# EAGLE board wifilight-leds-cheaper (EAGLE 7.2.0)
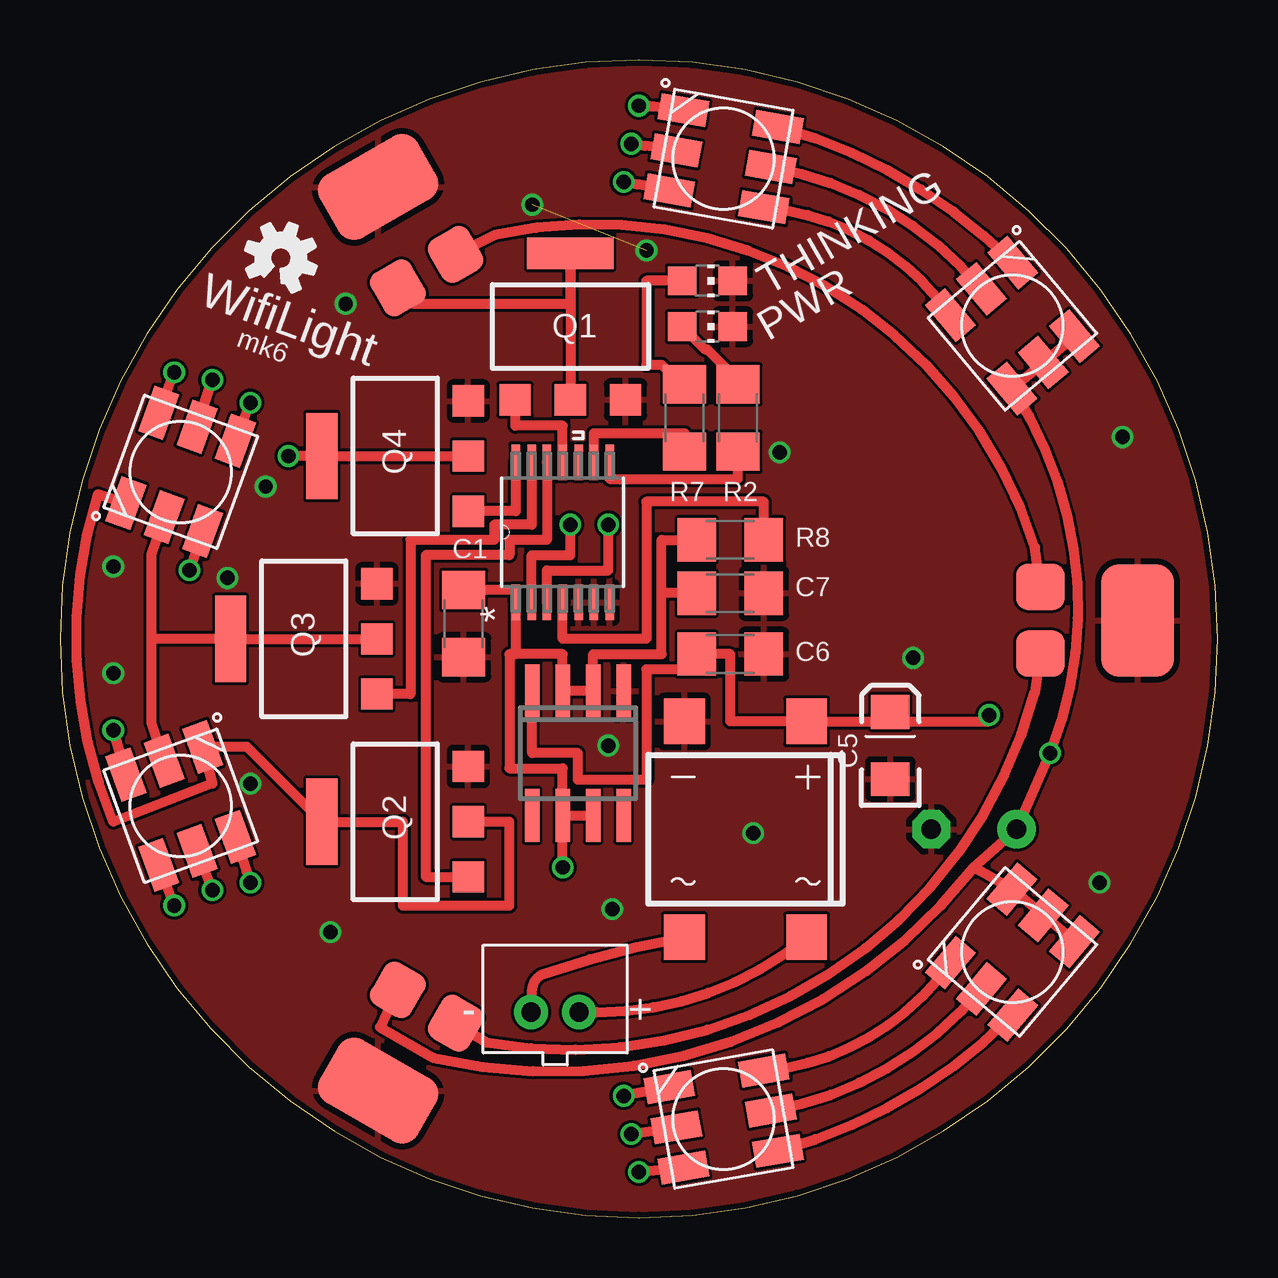
[diagram p0: board, top side]
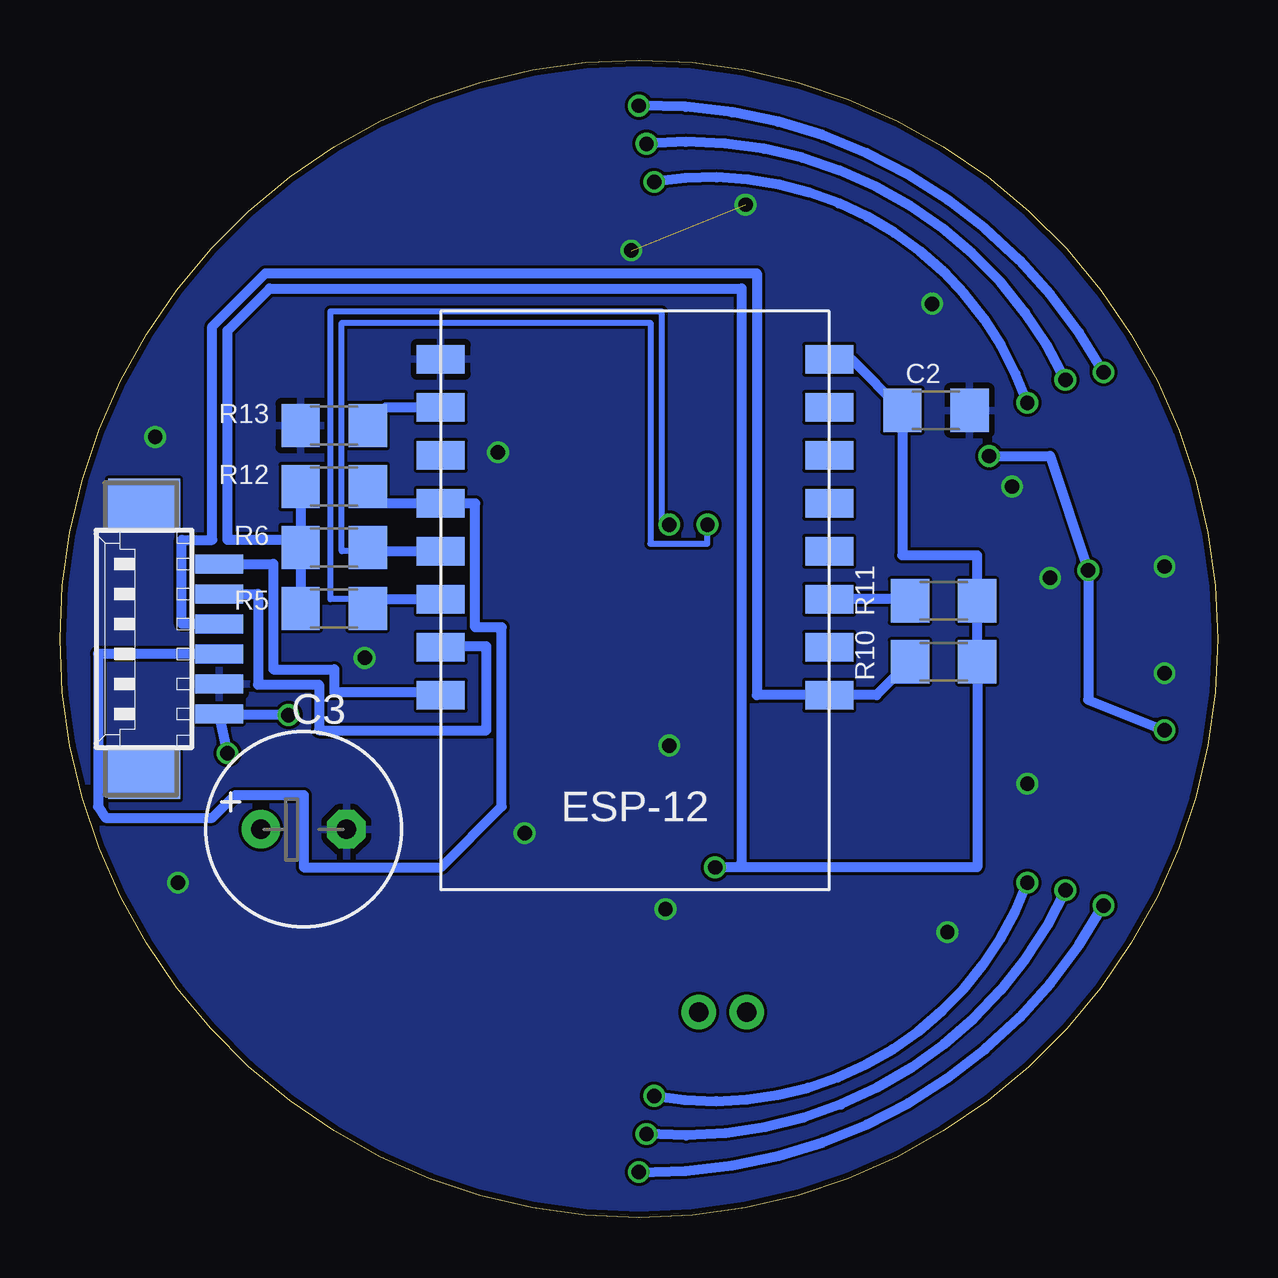
[diagram p1: board, bottom side, seen from below]

Size 48.26 x 48.26 mm. Coordinates in mm from the lower left corner, seen from the top.
Outline: 24.13,0 arc90 48.26,24.13 arc90 24.13,48.26 arc90 0,24.13 arc90 24.13,0
Copper layers (1*16): Top 0.035mm / dielectric 1.5mm / Bottom 0.035mm
Design rules "dirtypcbs": minimum track width 5mil, minimum drill 12mil, track to track 5mil, track to pad 5mil, pad to pad 5mil, via to via 5mil, smd to smd 0mil, copper to edge 10mil, drill to drill 10mil, minimum pad ring 10mil, minimum via ring 6mil, stop-mask expansion 2mil, vias tented up to drill 25mil, thermal gap 10mil

## Footprints (pad centres in the part's own frame; a part is rotated, then mirrored left to right if it is on the bottom)
DBS = smd 1.7 x 1.9: + -2.55,-4.5; - 2.55,-4.5; AC1 -2.55,4.5; AC2 2.55,4.5
1206 = smd 1.6 x 1.8: 1 -1.4,0; 2 1.4,0
E3,5-8 = drill 0.813 pad 1.6: + -1.778,0 | drill 0.813 pad 1.6 octagon: - 1.778,0
EIA3216 = smd 1.4 x 1.6: A 1.4,0; C -1.4,0
JST-PH-2-THM = drill 0.8 pad 1.422: 1 1,0; 2 -1,0
RGBLED5050 = smd 2 x 1.1: 1 -2,1.7; 2 -2,0; 3 -2,-1.7; 4 2,-1.7; 5 2,0; 6 2,1.7
ESP8266-ESP12 = smd 2 x 1.2: 1 16.2,2; 2 16.2,4; 3 16.2,6; 4 16.2,8; 5 16.2,10; 6 16.2,12; 7 16.2,14; 8 16.2,16; 9 0,16; 10 0,14; 11 0,12; 12 0,10; 13 0,8; 14 0,6; 15 0,4; 16 0,2
CHIP-LED0805 = smd 1.2 x 1.2: A 0,-1.05; C 0,1.05
SOT223 = smd 1.3 x 1.3: 1 -2.3,-3.05; 2 0,-3.05; 3 2.3,-3.05 | smd 3.6 x 1.3: 4 0,3.05
SO08 = smd 0.6 x 2.2: 1 -1.905,-2.6; 2 -0.635,-2.6; 3 0.635,-2.6; 4 1.905,-2.6; 5 1.905,2.6; 6 0.635,2.6; 7 -0.635,2.6; 8 -1.905,2.6
SOP65P640X120-14N = smd 1.473 x 0.356: 1 -2.921,1.956; 2 -2.921,1.295; 3 -2.921,0.66; 4 -2.921,0; 5 -2.921,-0.66; 6 -2.921,-1.295; 7 -2.921,-1.956; 8 2.921,-1.956; 9 2.921,-1.295; 10 2.921,-0.66; 11 2.921,0; 12 2.921,0.66; 13 2.921,1.295; 14 2.921,1.956
LUXEON-REBEL = smd 1.91 x 2.03: ANODE -1.39,2.63; CATHODE 1.39,2.63 | smd 4.68 x 3.03: P$3 0,-1.42
53261-06 = smd 0.8 x 2: 1 3.125,-2.5; 2 1.875,-2.5; 3 0.625,-2.5; 4 -0.625,-2.5; 5 -1.875,-2.5; 6 -3.125,-2.5 | smd 2.1 x 3: S1 5.625,0.625; S2 -5.625,0.625

## Placement (x,y rotation side)
B2  DBLS203G  [DBS]  28.57,16.19 180 top
C1  0.1uF  [1206]  16.83,24.77 270 top
C2  0.1uF  [1206]  11.75,33.65 0 bottom
C3  [E3,5-8]  38.1,16.19 0 bottom
C5  10uF  [EIA3216]  34.61,19.68 90 top
C6  0.1uF  [1206]  27.94,23.5 0 top
C7  10uF  [1206]  27.94,26.04 0 top
CN1  [JST-PH-2-THM]  20.64,8.57 0 top
LED1  RGBLED5050  [RGBLED5050]  39.7,11.07 230 top
LED2  RGBLED5050  [RGBLED5050]  27.66,4.11 190 top
LED3  RGBLED5050  [RGBLED5050]  5.03,17.17 110 top
LED4  RGBLED5050  [RGBLED5050]  39.7,37.19 130 top
LED5  RGBLED5050  [RGBLED5050]  27.66,44.15 170 top
LED6  RGBLED5050  [RGBLED5050]  5.03,31.09 250 top
MPU  ESP8266_ESP-12  [ESP8266-ESP12]  16.19,37.78 180 bottom
PWR  [CHIP-LED0805]  26.99,37.15 270 top
Q1  BUK98180-100A  [SOT223]  21.27,37.15 0 top
Q2  BUK98180-100A  [SOT223]  13.97,16.51 90 top
Q3  BUK98180-100A  [SOT223]  10.16,24.13 90 top
Q4  BUK98180-100A  [SOT223]  13.97,31.75 90 top
R2  220ohm  [1206]  28.26,33.34 90 top
R5  1k  [1206]  36.83,25.4 180 bottom
R6  1k  [1206]  36.83,27.94 180 bottom
R7  220ohm  [1206]  26.04,33.34 90 top
R8  10K  [1206]  27.94,28.26 0 top
R10  10k  [1206]  11.43,23.18 180 bottom
R11  10k  [1206]  11.43,25.72 180 bottom
R12  10k  [1206]  36.83,30.48 0 bottom
R13  10k  [1206]  36.83,33.02 0 bottom
REG2  MC33269-SO8  [SO08]  21.59,19.37 180 top
THINKING  [CHIP-LED0805]  26.99,39.05 270 top
U1  TCA6507PW  [SOP65P640X120-14N]  20.96,28.57 90 top
U$2  [OSHW-LOGO-S]  9.21,40 340 top
WL1  LUXEON-REBEL  [LUXEON-REBEL]  13.97,41.73 210 top
WL2  LUXEON-REBEL  [LUXEON-REBEL]  43.5,24.9 90 top
WL3  LUXEON-REBEL  [LUXEON-REBEL]  13.97,6.53 330 top
X1  53261-06  [53261-06]  44.13,24.13 90 bottom

## Library data of the parts
B2 = rectifier
C1 C2 C6 C7 R2 R5-R8 = SparkFun-Passives
C3 = rcl
C5 = SparkFun-Capacitors; PROD_ID: CAP-00811
CN1 LED1-LED6 = adafruit
MPU = ESP8266-ESP12
PWR THINKING = led
Q1-Q4 = nxp_60
R10-R13 = SparkFun-Resistors
REG2 = linear
U1 = Texas Instruments_By_element14_Batch_1; MPN: TCA6507PW; OC_FARNELL: 1647813; OC_NEWARK: 54M7301; PACKAGE: TSSOP-14; SUPPLIER: Texas Instruments
U$2 = SparkFun-Aesthetics
WL1-WL3 = SparkFun-LED
X1 = con-molex; OC_FARNELL: 1125375; OC_NEWARK: unknown

## Nets
3.3V: C1.1 C2.1 C7.1 MPU.16 R5.2 R6.2 R8.1 R10.1 R11.1 R12.1 REG2.2 REG2.3 REG2.6 REG2.7 U1.1
12V: B2.+ C3.+ C5.A C6.1 LED1.1 LED1.2 LED1.3 LED4.1 LED4.2 LED4.3 REG2.4 WL3.ANODE X1.6
AC1: B2.AC1 CN1.1
AC2: B2.AC2 CN1.2
ADC: MPU.10
BLUE: Q2.1 U1.12
CH_PD: MPU.11 R11.2
EN: R8.2 U1.4
GND: B2.- C1.2 C2.2 C3.- C5.C C6.2 C7.2 MPU.1 PWR.C Q1.3 Q2.3 Q3.3 Q4.3 R13.1 REG2.1 THINKING.C U1.5 U1.6 U1.7 WL1.P$3 WL2.P$3 WL3.P$3 X1.5
GPIO0: MPU.4 R12.2 X1.4
GPIO2: MPU.3
GPIO12: MPU.14
GPIO13: MPU.15
GPIO14: MPU.13
GPIO15: MPU.2 R13.2
GPIO16: MPU.12
GREEN: Q4.1 U1.14
N$6: U1.10
N$14: PWR.A R2.2
N$15: R7.2 THINKING.A
N$30: LED2.5 LED3.2
N$31: LED2.6 LED3.1
N$32: LED2.4 LED3.3
N$33: LED1.5 LED2.2
N$34: LED1.6 LED2.1
N$35: LED1.4 LED2.3
N$37: LED4.5 LED5.2
N$38: LED4.6 LED5.1
N$39: LED4.4 LED5.3
N$40: LED5.5 LED6.2
N$41: LED5.6 LED6.1
N$42: LED5.4 LED6.3
P_BLUE: LED3.4 LED6.4 Q2.2 Q2.4
P_GREEN: LED3.6 LED6.6 Q4.2 Q4.4
P_RED: LED3.5 LED6.5 Q3.2 Q3.4
P_WHITE: Q1.2 Q1.4 WL1.CATHODE
POWERED: R2.1 U1.8
RED: Q3.1 U1.13
RESET: MPU.9 R10.2 X1.3
RXD: MPU.7 X1.2
SCL: MPU.5 R6.1 U1.2
SDA: MPU.6 R5.1 U1.3
THINKING: R7.1 U1.9
TXD: MPU.8 X1.1
W1: WL2.ANODE WL3.CATHODE
W2: WL1.ANODE WL2.CATHODE
WHITE: Q1.1 U1.11

## Tracks (layer width: path | path; a pad name or v marks a point on that pad's centre or on a via)
3.3V  (via drill 0.6)
  Top 0.406: REG2.6 REG2.7 | 19,23.5 20.96,23.5 REG2.3 REG2.2 22.23,23.5 25.08,23.5 25.08,26.04 | REG2.6 20.96,18.73 18.73,18.73 18.73,23.5 19,23.5 | 19,23.5 U1.1 19,26.16 C1.1 | 25.08,26.04 25.08,28.26 R8.1 | C7.1 25.08,26.04 | v20.96,14.61 REG2.6
  Bottom 0.406: MPU.16 15.28,35.78 C2.1 13.15,27.62 10.03,27.62 R11.1 R10.1 10.03,14.61 20,14.61 | R12.1 38.23,28.26 | R5.2 R6.2 38.23,28.26 | 20,14.61 v20.96,14.61 | 38.23,28.26 41.27,28.26 41.27,36.99 39.53,38.73 19.84,38.73 19.84,14.76 20,14.61
12V  (via drill 0.6)
  Top 0.406: WL3.ANODE 13.34,7.94 15.56,6.67 arc65 38.1,14.61 | LED1.1 LED1.2 LED1.3 38.1,14.61 | REG2.4 19.68,19.37 21.59,19.37 21.59,18.26 24.45,18.26 24.45,22.86 26.04,22.86 26.04,23.5 C6.1 27.94,23.5 27.94,20.69 B2.+ | 38.1,14.61 C3.+ v41.27,19.37 arc55 LED4.1 LED4.2 LED4.3 | B2.+ 38.73,20.69 v38.73,20.96 | B2.+ 34.29,20.69 C5.A
  Bottom 0.406: v41.27,19.37 X1.6 41.63,20.96 v38.73,20.96
AC1
  Top 0.406: CN1.1 22.38,8.57 arc39 B2.AC1
AC2
  Top 0.406: CN1.2 19.68,9.53 arc-68 20.16,10.16 arc-9 B2.AC2
BLUE
  Top 0.406: U1.12 20.3,28.26 18.73,28.26 18.73,27.62 15.24,27.62 15.24,14.21 Q2.1
CH_PD
  Bottom 0.406: R11.2 12.89,25.78 MPU.11
EN
  Top 0.406: R8.2 29.34,29.84 24.45,29.84 24.45,24.13 20.96,24.13 U1.4
GND  (via drill 0.6)  (1 unrouted)
  other vias: 24.45,40.32 6.99,26.67 8.57,30.48 7.94,18.1 35.56,23.34 22.86,19.68 2.22,27.15 2.22,22.7 11.27,11.91 23.02,12.86 28.89,16.03 43.34,13.97 44.29,32.54 30,31.91 11.91,38.1 19.68,42.23
  pour Top: 48.26,24.13 arc90 24.13,48.26 arc90 0,24.13 arc90 24.13,0 arc90
  pour Bottom: 24.13,48.26 arc90 0,24.13 arc90 24.13,0 arc90 48.26,24.13 arc90
GPIO0
  Bottom 0.406: R12.2 34.73,29.78 MPU.4 30.96,29.78 30.96,24.61 29.84,24.61 29.84,17.14 32.38,14.61 38.1,14.61 38.1,17.62 40.96,17.62 41.91,16.67 46.35,16.67 46.67,17.14 46.67,23.5 X1.4
GPIO15
  Bottom 0.406: R13.2 34.67,33.78 MPU.2
GREEN
  Top 0.406: U1.14 19,29.45 Q4.1
N$14
  Top 0.406: PWR.A 26.89,36.2 26.99,36.2 28.26,34.92 R2.2
N$15
  Top 0.406: THINKING.A 24.45,39.05 24.45,35.56 25.08,35.56 25.91,34.74 R7.2
N$30  (via drill 0.6)
  Top 0.406: LED3.2 v6.35,13.65 | LED2.5 24.84,3.64 v23.81,3.49
  Bottom 0.406: v6.35,13.65 arc70 v23.81,3.49
N$31  (via drill 0.6)
  Top 0.406: LED3.1 4.34,14.13 v4.76,13.02 | LED2.6 v24.13,1.9
  Bottom 0.406: v24.13,1.9 arc-62 v4.76,13.02
N$32  (via drill 0.6)
  Top 0.406: LED3.3 7.78,14.45 v7.94,13.97 | LED2.4 v23.5,5.08
  Bottom 0.406: v23.5,5.08 arc-80 v7.94,13.97
N$33
  Top 0.406: LED2.2 arc40 LED1.5
N$34
  Top 0.406: LED2.1 arc30 LED1.6
N$35
  Top 0.406: LED2.3 arc50 LED1.4
N$37
  Top 0.406: LED5.2 arc-40 LED4.5
N$38
  Top 0.406: LED5.1 arc-50 LED4.6
N$39
  Top 0.406: LED5.3 arc-30 LED4.4
N$40  (via drill 0.6)
  Top 0.406: LED6.2 v6.35,34.92 | LED5.5 24.39,44.68 v23.81,44.77
  Bottom 0.406: v6.35,34.92 arc-70 v23.81,44.77
N$41  (via drill 0.6)
  Top 0.406: LED6.1 v7.94,33.97 | LED5.6 24.05,43.07 v23.5,43.18
  Bottom 0.406: v7.94,33.97 arc-80 v23.5,43.18
N$42  (via drill 0.6)
  Top 0.406: LED6.3 v4.76,35.24 | LED5.4 24.76,46.32 | 24.76,46.32 24.45,46.35 v24.13,46.35 24.76,46.32
  Bottom 0.406: v4.76,35.24 arc-62 v24.13,46.35
P_BLUE
  Top 0.406: LED6.4 1.59,30.16 arc40 2.22,16.51 6.35,18.1 LED3.4 7.8,19.63 Q2.4 14.29,16.51 14.29,13.02 18.73,13.02 18.73,16.51 Q2.2
P_GREEN  (via drill 0.6)
  Top 0.406: LED6.6 v5.4,26.99 | v2.22,20.32 LED3.6 | v9.53,31.75 Q4.4 Q4.2
  Bottom 0.406: v2.22,20.32 5.4,21.59 v5.4,26.99 6.99,31.75 v9.53,31.75
P_RED
  Top 0.406: LED6.5 3.81,27.62 3.81,24.13 | 3.81,24.13 3.81,20.64 LED3.5 | 3.81,24.13 Q3.4 Q3.2
P_WHITE
  Top 0.406: WL1.CATHODE 14.74,38.1 21.27,38.1 Q1.4 Q1.2
POWERED
  Top 0.406: U1.8 22.91,30.8 28.26,30.8 R2.1
RED
  Top 0.406: U1.13 19.66,28.89 18.1,28.89 18.1,28.26 14.61,28.26 14.61,21.83 Q3.1
RESET
  Bottom 0.406: R10.2 14.22,21.78 MPU.9 19.21,21.78 19.21,39.37 39.69,39.37 41.91,37.15 41.91,28.26 43.18,28.26 43.18,24.75 X1.3
RXD
  Bottom 0.406: X1.2 40,26 40,22.23 37.46,22.23 37.46,20.32 30.48,20.32 30.48,23.81 32.39,23.81 MPU.7
SCL  (via drill 0.6)
  Top 0.406: U1.2 19.66,27.62 21.27,27.62 v21.27,28.89
  Bottom 0.254: MPU.5 36.51,27.78 36.51,37.31 23.65,37.31 23.65,28.1 21.27,28.1 v21.27,28.89
  Bottom 0.406: R6.1 35.27,27.78 MPU.5
SDA  (via drill 0.6)
  Top 0.406: U1.3 20.3,26.99 22.86,26.99 v22.86,28.89
  Bottom 0.254: MPU.6 36.99,25.78 36.99,37.78 23.18,37.78 23.18,28.89 v22.86,28.89
  Bottom 0.406: R5.1 35.05,25.78 MPU.6
THINKING
  Top 0.406: U1.9 22.25,32.7 26.04,32.7 R7.1
TXD
  Bottom 0.406: X1.1 39.37,27.25 39.37,22.86 36.83,22.86 36.83,21.91 32.39,21.91 MPU.8
W1
  Top 0.406: WL2.ANODE 40.64,21.91 arc-85 17.78,7.3 WL3.CATHODE
W2
  Top 0.406: WL1.ANODE 18.1,40.96 arc-85 40.64,27.94 WL2.CATHODE
WHITE
  Top 0.406: U1.11 20.96,33.02 18.97,33.02 Q1.1

## Text on the board
tNames: WifiLight | mk6